# EAGLE board 1transmitter (EAGLE 7.2.0)
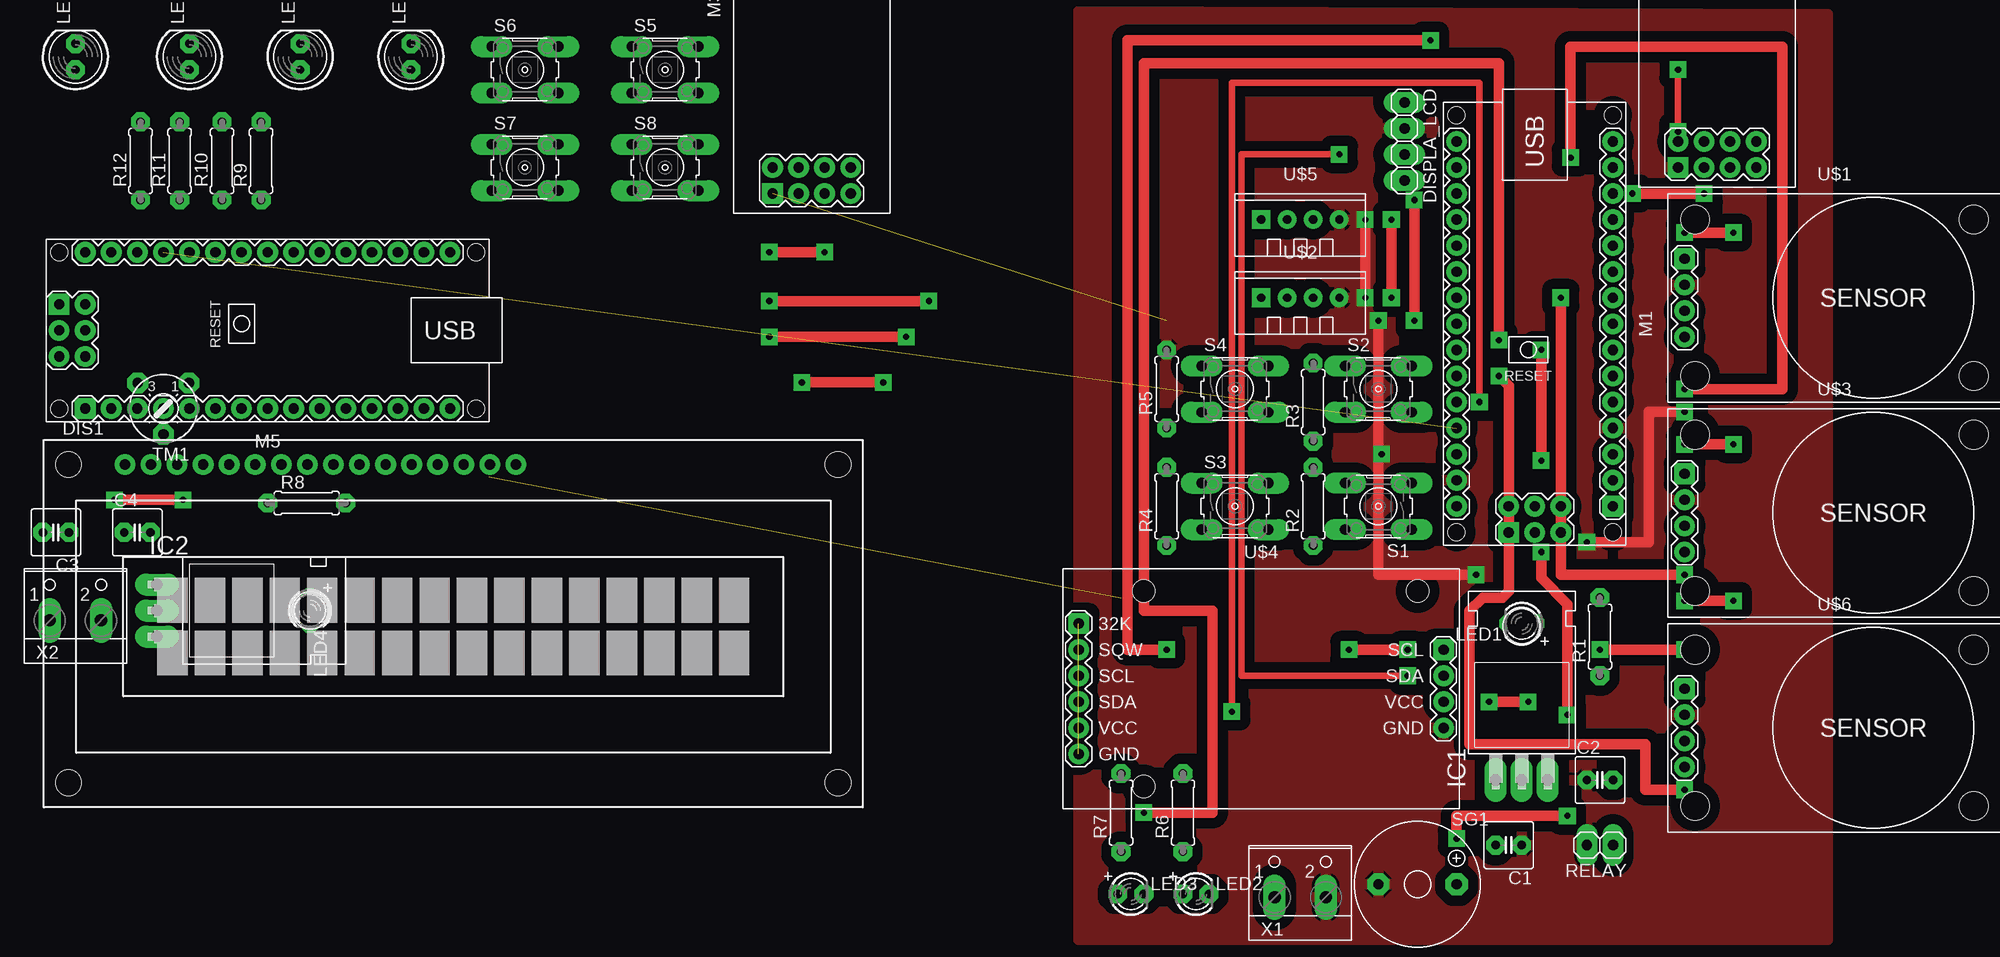
[diagram p0: board, top side]
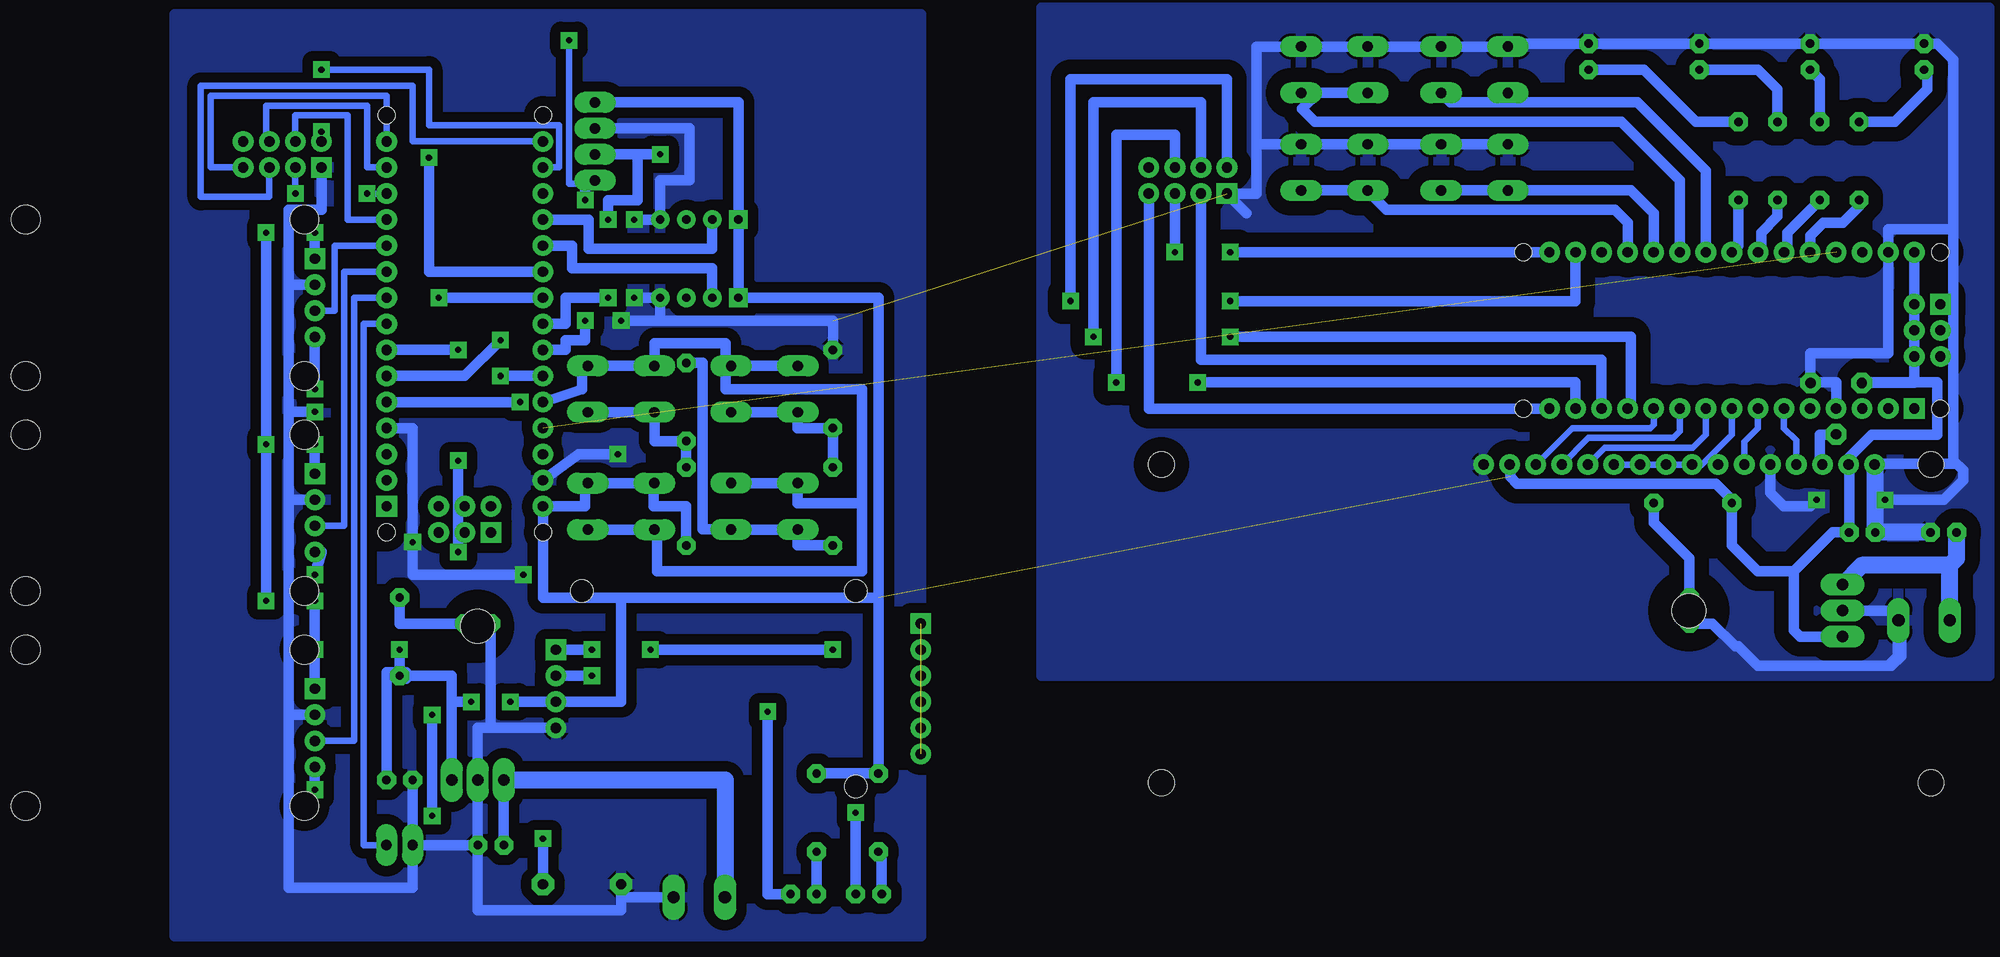
[diagram p1: board, bottom side, seen from below]

No outline drawn. Coordinates in mm, seen from the top.
Copper layers (1*16): Top 0.035mm / dielectric 1.5mm / Bottom 0.035mm
Design rules "default *": minimum track width 10mil, minimum drill 24mil, track to track 8mil, track to pad 8mil, pad to pad 8mil, via to via 8mil, smd to smd 8mil, copper to edge 40mil, drill to drill 8mil, minimum pad ring 21mil, minimum via ring 21mil, stop-mask expansion 4mil, vias tented up to drill 0mil, thermal gap 10mil

## Footprints (pad centres in the part's own frame; a part is rotated, then mirrored left to right if it is on the bottom)
C025-050X050 = drill 0.813 octagon: 1 -1.27,0; 2 1.27,0
TUXGR_16X2_R2 = drill 1 pad 1.676: 1 -32,15.5; 2 -29.46,15.5; 3 -26.92,15.5; 4 -24.38,15.5; 5 -21.84,15.5; 6 -19.3,15.5; 7 -16.76,15.5; 8 -14.22,15.5; 9 -11.68,15.5; 10 -9.14,15.5; 11 -6.6,15.5; 12 -4.06,15.5; 13 -1.52,15.5; 14 1.02,15.5; 15 3.56,15.5; 16 6.1,15.5 | hole 2.5: -37.5,-15.5; 37.5,-15.5; -37.5,15.5; 37.5,15.5
1X04 = drill 1.016 long: 1 -3.81,0; 2 -1.27,0; 3 1.27,0; 4 3.81,0
TO220H = drill 1.118 long: 1 -2.54,-10.16; 2 0,-10.16; 3 2.54,-10.16 | hole 3.302: 0,4.826
LED3MM = drill 0.813 pad 1.676 octagon: A -1.27,0; K 1.27,0
LED5MM = drill 0.813 pad 1.676 octagon: A -1.27,0; K 1.27,0
ARDUINO-NANO-3.0#ISP = drill 1 square: J1.1 17.78,7.62; J4.1 20.32,-2.54 | drill 1: J1.2 15.24,7.62; J1.3 12.7,7.62; J1.4 10.16,7.62; J1.5 7.62,7.62; J1.6 5.08,7.62; J1.7 2.54,7.62; J1.8 0,7.62; J1.9 -2.54,7.62; J1.10 -5.08,7.62; J1.11 -7.62,7.62; J1.12 -10.16,7.62; J1.13 -12.7,7.62; J1.14 -15.24,7.62; J1.15 -17.78,7.62; J2.1 17.78,-7.62; J2.2 15.24,-7.62; J2.3 12.7,-7.62; J2.4 10.16,-7.62; J2.5 7.62,-7.62; J2.6 5.08,-7.62; J2.7 2.54,-7.62; J2.8 0,-7.62; J2.9 -2.54,-7.62; J2.10 -5.08,-7.62; J2.11 -7.62,-7.62; J2.12 -10.16,-7.62; J2.13 -12.7,-7.62; J2.14 -15.24,-7.62; J2.15 -17.78,-7.62; J4.2 17.78,-2.54; J4.3 20.32,0; J4.4 17.78,0; J4.5 20.32,2.54; J4.6 17.78,2.54 | hole 1.651: -20.32,7.62; -20.32,-7.62; 20.32,-7.62; 20.32,7.62
WIRELESS-NRF24L01-PA-EXT = drill 1 square: 1 -18.415,3.81 | drill 1: 2 -15.875,3.81; 3 -18.415,1.27; 4 -15.875,1.27; 5 -18.415,-1.27; 6 -15.875,-1.27; 7 -18.415,-3.81; 8 -15.875,-3.81
0207/7 = drill 0.813 octagon: 1 -3.81,0; 2 3.81,0
1X02 = drill 1.016 long: 1 -1.27,0; 2 1.27,0
B3F-10XX = drill 1.016 long: 1 -3.251,2.261; 2 3.251,2.261; 3 -3.251,-2.261; 4 3.251,-2.261
F/TMB = drill 1.016 pad 2.159 octagon: + 3.81,0; - -3.81,0
6MM = drill 1 pad 1.676 octagon: A -2.5,-2.5; E 2.5,-2.5; S 0,2.5
GAS-SENSOR-MQ2 = drill 1 square: 1 -14.605,3.81 | drill 1: 2 -14.605,1.27; 3 -14.605,-1.27; 4 -14.605,-3.81 | hole 2.8: -13.589,7.62; -13.589,-7.62; 13.589,-7.62; 13.589,7.62
TEMP-HUM-SENSOR-DHT11 = drill 0.8 square: 1 -3.81,0 | drill 0.8: 2 -1.27,0; 3 1.27,0; 4 3.81,0
RTC-DS3231-AT24C32 = drill 1 square: J1.1 -17.78,6.35; J2.1 17.78,3.81 | drill 1: J1.2 -17.78,3.81; J1.3 -17.78,1.27; J1.4 -17.78,-1.27; J1.5 -17.78,-3.81; J1.6 -17.78,-6.35; J2.2 17.78,1.27; J2.3 17.78,-1.27; J2.4 17.78,-3.81 | hole 2.2: -11.43,-9.525; -11.43,9.525; 15.24,9.525
W237-102 = drill 1.194 long: 1 -2.5,-1.27; 2 2.5,-1.27

## Placement (x,y rotation side)
C1  [C025-050X050]  113.03,11.43 180 top
C2  [C025-050X050]  121.92,17.78 0 top
C3  [C025-050X050]  -28.57,41.91 180 top
C4  [C025-050X050]  -20.64,41.91 0 top
DIS1  TUXGR_16X2_R2  [TUXGR_16X2_R2]  10.16,33.02 0 top
DISPLA_LCD  [1X04]  102.87,80.01 270 top
IC1  7805T  [TO220H]  114.3,27.94 0 top
IC2  7805T  [TO220H]  -8.57,34.29 270 top
LED1  [LED3MM]  114.3,33.02 180 top
LED2  [LED3MM]  82.55,6.67 0 top
LED3  [LED3MM]  76.2,6.67 0 top
LED4  [LED3MM]  -3.81,34.29 270 top
LED5  [LED5MM]  6.03,88.27 90 top
LED6  [LED5MM]  -4.76,88.27 90 top
LED7  [LED5MM]  -15.56,88.27 90 top
LED8  [LED5MM]  -26.67,88.27 90 top
M1  ARDUINO-NANO-3.0#ISP  [ARDUINO-NANO-3.0#ISP]  115.57,62.23 270 top
M2  WIRELESS-NRF24L01-PA-EXT  [WIRELESS-NRF24L01-PA-EXT]  133.35,95.89 90 top
M3  WIRELESS-NRF24L01-PA-EXT  [WIRELESS-NRF24L01-PA-EXT]  45.09,93.34 90 top
M5  ARDUINO-NANO-3.0#ISP  [ARDUINO-NANO-3.0#ISP]  -7.94,61.59 180 top
R1  [0207/7]  121.92,31.75 90 top
R2  [0207/7]  93.98,44.45 90 top
R3  [0207/7]  93.98,54.61 90 top
R4  [0207/7]  79.69,44.45 90 top
R5  [0207/7]  79.69,55.88 90 top
R6  [0207/7]  81.28,14.61 90 top
R7  [0207/7]  75.25,14.61 90 top
R8  [0207/7]  -4.13,44.77 0 top
R9  [0207/7]  -8.57,78.11 90 top
R10  [0207/7]  -12.38,78.11 90 top
R11  [0207/7]  -16.51,78.11 90 top
R12  [0207/7]  -20.32,78.11 90 top
RELAY  [1X02]  121.92,11.43 180 top
S1  [B3F-10XX]  100.33,44.45 180 top
S2  [B3F-10XX]  100.33,55.88 0 top
S3  [B3F-10XX]  86.36,44.45 0 top
S4  [B3F-10XX]  86.36,55.88 0 top
S5  [B3F-10XX]  30.8,87 0 top
S6  [B3F-10XX]  17.14,87 0 top
S7  [B3F-10XX]  17.14,77.47 0 top
S8  [B3F-10XX]  30.8,77.47 0 top
SG1  F/TMB  [F/TMB]  104.14,7.62 0 top
TM1  [6MM]  -18.1,53.98 180 top
U$1  GAS-SENSOR-MQ2  [GAS-SENSOR-MQ2]  144.78,64.77 0 top
U$2  TEMP-HUM-SENSOR-DHT11  [TEMP-HUM-SENSOR-DHT11]  92.71,64.77 0 top
U$3  GAS-SENSOR-MQ2  [GAS-SENSOR-MQ2]  144.78,43.81 0 top
U$4  RTC-DS3231-AT24C32  [RTC-DS3231-AT24C32]  88.9,26.67 0 top
U$5  TEMP-HUM-SENSOR-DHT11  [TEMP-HUM-SENSOR-DHT11]  92.71,72.39 0 top
U$6  GAS-SENSOR-MQ2  [GAS-SENSOR-MQ2]  144.78,22.86 0 top
X1  [W237-102]  92.71,7.62 0 top
X2  [W237-102]  -26.67,34.61 0 top

## Library data of the parts
C1-C4 IC1 IC2 LED1-LED8 TM1 = adafruit
DIS1 = display-lcd; OC_FARNELL: unknown; OC_NEWARK: unknown
DISPLA_LCD RELAY = pinhead
M1-M3 M5 U$1-U$3 U$5 U$6 = diy-modules
R1-R12 = rcl
S1-S8 = switch-omron; MPN: B3F-1000; OC_FARNELL: 176432; OC_NEWARK: 36M3542
SG1 = buzzer; OC_FARNELL: unknown; OC_NEWARK: unknown
U$4 = diy-modules(1)
X1 X2 = con-wago-500; MPN: 237-102; OC_FARNELL: unknown; OC_NEWARK: 70K9898

## Nets
3.3V: M1.J2.14 M2.2
3.3VOLT: M3.2 M5.J2.14
5V: M1.J2.4 M5.J2.4
A_MQ: M1.J2.10 U$1.4
A_MQ1: M1.J2.9 U$3.4
A_MQ2: M1.J2.6 U$6.4
BUT1: M5.J2.10 S5.4
BUT2: M5.J2.9 S6.4
BUT3: M5.J2.12 S8.4
BUT4: M5.J2.11 S7.4
BUZZER: M1.J1.7 SG1.+
CE: M1.J1.13 M2.3
CE1: M3.3 M5.J1.13
CSN: M1.J1.12 M2.4
CSN1: M3.4 M5.J1.12
D4: DIS1.11 M5.J1.8
D5: DIS1.12 M5.J1.9
D6: DIS1.13 M5.J1.10
D7: DIS1.14 M5.J1.11
D_MQ: M1.J1.11 U$1.3
D_MQ1: M1.J1.10 U$3.3
D_MQ2: M1.J1.9 U$6.3
DATAPUSH: M1.J2.5 S1.1 S1.2 S2.1 S2.2 S3.1 S3.2 S4.1 S4.2
DHT_11: M1.J2.11 U$2.2
DHT_12: M1.J2.12 U$5.2
E: DIS1.6 M5.J1.7
GND: C1.1 C2.1 C3.1 C4.1 DIS1.1 DIS1.5 DIS1.16 DISPLA_LCD.2 IC1.2 IC2.2 LED1.K LED4.K LED5.K LED6.K LED7.K LED8.K M1.J1.4 M1.J2.2 M2.1 M3.1 M5.J1.4 M5.J2.2 R5.2 RELAY.2 S5.1 S5.2 S6.1 S6.2 S7.1 S7.2 S8.1 S8.2 SG1.- TM1.A U$1.2 U$2.4 U$3.2 U$4.J2.4 U$5.4 U$6.2 X1.2 X2.2
LED1: M5.J2.8 R9.1
LED2: M5.J2.7 R10.1
LED3: M5.J2.6 R11.1
LED4: M5.J2.5 R12.1
MISO: M1.J1.15 M2.7
MISO1: M3.7 M5.J1.15
MOSI: M1.J1.14 M2.6
MOSI1: M3.6 M5.J1.14
N$1: C1.2 IC1.1 X1.1
N$2: LED1.A R1.2
N$3: U$4.J1.1 U$4.J1.2 U$4.J1.3 U$4.J1.4 U$4.J1.5 U$4.J1.6
N$4: LED2.A R6.1
N$5: R2.2 R3.1 S2.3 S2.4
N$6: LED3.A R7.1
N$7: R3.2 R4.1 S3.3 S3.4
N$8: LED2.K M1.J1.5
N$9: R4.2 R5.1 S4.3 S4.4
N$10: LED3.K M1.J1.6
N$11: C3.2 IC2.1 X2.1
N$12: LED4.A R8.2
N$13: DIS1.3 TM1.S
N$14: M5.J1.5
N$24: LED5.A R9.2
N$25: LED6.A R10.2
N$26: LED7.A R11.2
N$27: LED8.A R12.2
RELAY: M1.J1.8 RELAY.1
RS: DIS1.4 M5.J1.6
SCK: M1.J2.15 M2.5
SCK1: M3.5 M5.J2.15
SCL: DISPLA_LCD.4 M1.J2.7 U$4.J2.1
SDA: DISPLA_LCD.3 M1.J2.8 U$4.J2.2
VCC: C2.2 C4.2 DIS1.2 DIS1.15 DISPLA_LCD.1 IC1.3 IC2.3 M1.J2.1 M5.J2.1 R1.1 R2.1 R6.2 R7.2 R8.1 S1.3 S1.4 TM1.E U$1.1 U$2.1 U$3.1 U$4.J2.3 U$5.1 U$6.1

## Tracks (layer width: path | path; a pad name or v marks a point on that pad's centre or on a via)
3.3V  (via drill 0.6)
  Top 0.61: v129.54,80.96 v129.54,87
  Bottom 0.61: M2.2 v129.54,80.96 | v129.54,87 119.06,87 119.06,81.6 106.36,81.6 106.36,77.47 M1.J2.14
3.3VOLT  (via drill 0.6)
  Top 1.016: v56.52,64.45 v40.96,64.45
  Bottom 1.016: M3.2 41.27,86.04 56.52,86.04 v56.52,64.45 | v40.96,64.45 7.3,64.45 M5.J2.14
5V  (1 unrouted)
A_MQ  (via drill 0.6)
  Top 1.016: v130.18,55.88 139.7,55.88 139.7,89.22 119.06,89.22 v119.06,78.42
  Bottom 1.016: M1.J2.10 119.06,67.31 v119.06,78.42 | v130.18,55.88 U$1.4
A_MQ1  (via drill 0.6)
  Top 1.016: v130.18,37.78 118.11,37.78 v118.11,64.77
  Bottom 1.016: U$3.4 129.54,40.01 v130.18,37.78 | v118.11,64.77 M1.J2.9
A_MQ2  (via drill 0.6)
  Top 1.016: v130.18,16.83 126.36,16.83 126.36,21.27 109.22,21.27 109.22,34.29 110.49,35.56 112.39,35.56 113.03,36.2 113.03,56.2 v112.08,57.15
  Bottom 1.016: U$6.4 v130.18,16.83 | v112.08,57.15 M1.J2.6
BUT1
  Bottom 1.016: M5.J2.10 -2.86,76.2 2.86,81.92 32.7,81.92 33.97,83.19 32.38,84.77 27.3,84.77 27.34,84.73 S5.4
BUT2
  Bottom 1.016: M5.J2.9 -5.4,77.15 1.27,83.82 19.48,83.82 S6.4
BUT3
  Bottom 1.016: M5.J2.12 2.22,72.07 3.49,73.34 25.72,73.34 27.62,75.25 34.01,75.25 S8.4
BUT4
  Bottom 1.016: M5.J2.11 -0.32,73.03 1.91,75.25 20.36,75.25 S7.4
BUZZER  (via drill 0.6)
  Top 1.016: v118.75,14.29 107.95,14.29 v107.95,12.06 | v118.75,24.13 118.75,34.92 116.2,37.47 v116.2,40.01 | v116.2,48.9 v116.2,59.69
  Bottom 1.016: v118.75,24.13 v118.75,14.29 | v107.95,12.06 SG1.+ | v116.2,40.01 v116.2,48.9 | v116.2,59.69 M1.J1.7
CE  (via drill 0.6)
  Top 0.61: 132.08,74.61 v132.08,74.93
  Top 1.016: v125.09,74.93 v132.08,74.93
  Bottom 0.61: M1.J1.13 v125.09,74.93 | v132.08,74.93 M2.3
CE1
  Bottom 1.016: M5.J1.13 4.76,58.74 43.81,58.74 M3.3
CSN
  Bottom 0.61: M2.4 132.08,82.55 127,82.55 127,72.39 M1.J1.12
CSN1  (via drill 0.6)
  Top 1.016: v40.96,60.96 v54.29,60.96
  Bottom 1.016: M5.J1.12 1.91,53.98 1.91,60.96 v40.96,60.96 | v54.29,60.96 54.29,83.82 43.81,83.82 M3.4
D4
  Bottom 0.61: DIS1.11 -5.02,48.52 -7.94,51.44 M5.J1.8
D5
  Bottom 0.61: M5.J1.9 -5.4,51.44 -4.13,50.16 4.46,50.16 DIS1.12
D6
  Bottom 0.61: M5.J1.10 -2.86,51.75 -2.22,51.12 6.04,51.12 DIS1.13
D7
  Bottom 0.61: M5.J1.11 -0.32,52.39 0,52.07 7.63,52.07 DIS1.14
D_MQ
  Bottom 0.61: M1.J1.11 128.27,69.85 128.27,63.5 U$1.3
D_MQ1
  Bottom 0.61: M1.J1.10 127.32,67.31 127.32,42.55 U$3.3
D_MQ2
  Bottom 0.61: M1.J1.9 126.36,64.77 126.36,21.59 U$6.3
DATAPUSH
  Bottom 1.016: S1.1 S1.2 96.84,42.19 96.84,38.1 76.83,38.1 76.83,44.77 | S3.2 S3.1 83.11,44.77 76.83,44.77 | S4.1 S4.2 90.17,58.14 | 90.17,58.14 90.17,60.33 97.08,60.33 S2.1 S2.2 104.14,58.14 104.14,55.88 M1.J2.5 | 76.83,44.77 76.83,55.88 90.17,55.88 90.17,58.14
DHT_11
  Bottom 1.016: U$2.2 91.44,67.63 105.09,67.63 105.09,69.85 M1.J2.11
DHT_12
  Bottom 1.016: U$5.2 91.44,69.53 103.5,69.53 103.5,72.39 M1.J2.12
E
  Bottom 0.61: DIS1.6 -9.14,50.73 -10.48,52.07 M5.J1.7
GND  (via drill 0.6)  (1 unrouted)
  Top 1.016: v99.06,64.77 v99.06,72.39 | v120.65,40.96 126.68,40.96 126.68,53.66 v130.18,53.66 | v100.65,49.53 100.33,49.53 | 100.33,49.53 v100.33,62.55 | v109.86,37.78 100.33,37.78 100.33,49.53 | v-16.19,45.09 v-22.86,45.09
  Bottom 1.016: X1.2 100.33,6.35 | 100.33,6.35 SG1.- | C1.1 114.3,5.08 100.33,5.08 100.33,6.35 | 120.65,12.7 RELAY.2 | C2.1 RELAY.2 | U$4.J2.4 113.03,22.86 | C1.1 IC1.2 114.3,22.86 113.03,22.86 | 113.03,22.86 LED1.K | 96.52,62.55 U$2.4 v99.06,64.77 | U$6.2 132.72,24.13 | 132.72,24.13 132.72,7.3 120.65,7.3 RELAY.2 | 132.72,45.09 132.72,53.66 | 132.72,53.66 132.72,66.04 | U$3.2 132.72,45.09 | 132.72,45.09 132.72,24.13 | U$1.2 132.72,66.04 | M2.1 129.54,73.34 132.72,73.34 132.72,66.04 | C1.1 RELAY.2 | M1.J1.4 120.65,52.07 v120.65,40.96 120.65,37.78 v109.86,37.78 | v130.18,53.66 132.72,53.66 | M1.J2.2 104.46,49.53 v100.65,49.53 | v100.33,62.55 96.52,62.55 | v99.06,72.39 U$5.4 96.52,76.2 93.66,76.2 93.66,81.28 DISPLA_LCD.2 | R5.2 79.69,62.55 96.52,62.55 | DIS1.1 -21.84,48.58 -29.53,48.58 -29.53,48.9 | M5.J1.4 -18.1,56.52 -15.6,56.52 TM1.A -15.6,59.37 -23.18,59.37 M5.J2.2 -23.18,71.44 -29.53,71.44 | -29.53,48.9 -29.53,71.44 | -29.53,71.44 -29.53,87.95 -27.94,89.53 LED8.K LED7.K LED6.K LED5.K 13.61,89.53 S6.1 S6.2 S5.1 S5.2 34.05,89.22 38.42,89.22 38.42,79.73 | S7.1 S7.2 S8.1 S8.2 38.42,79.73 | 38.42,79.73 38.42,74.93 M3.1 39.37,73.03 | X2.2 -24.17,34.25 -24.13,34.29 IC2.2 | DIS1.5 -11.68,45.79 -13.02,44.45 -15.56,44.45 v-16.19,45.09 | v-22.86,45.09 -28.57,45.09 -30.48,46.99 -30.48,47.94 -29.53,48.9 | LED4.K -6.03,33.02 -8.26,30.8 -8.57,30.8 -10.48,28.89 -23.18,28.89 | -23.18,28.89 -23.5,28.89 -24.45,29.84 -24.45,33.34 -24.13,33.66 -24.13,29.84 -23.18,28.89
  Bottom 1.676: C3.1 C4.1 -21.91,48.45 DIS1.1
  pour Bottom (isolate 1.016): 71.12,90.49 71.12,2.54 143.83,2.54 143.83,92.39 71.12,92.39
  pour Top (isolate 1.016): 71.12,92.71 144.15,92.39 144.15,2.22 71.12,2.22
  pour Bottom (isolate 1.422): -33.02,27.94 -33.02,93.03 59.37,93.03 59.37,27.94
LED1
  Bottom 1.016: R9.1 -8.57,69.85 M5.J2.8
LED2
  Bottom 1.016: R10.1 -12.38,72.71 -10.79,71.12 -10.79,69.53 M5.J2.7
LED3
  Bottom 1.016: R11.1 -13.34,71.12 -13.34,69.53 M5.J2.6
LED4
  Bottom 1.016: R12.1 -20.32,73.66 -18.73,72.07 -16.83,72.07 -15.56,70.8 M5.J2.5
MISO
  Bottom 0.61: M2.7 140.34,77.47 140.34,84.45 123.19,84.45 M1.J1.15
MISO1
  Bottom 1.016: M5.J1.15 48.9,53.98 M3.7
MOSI
  Bottom 0.61: M2.6 134.94,80.01 134.94,83.5 125.09,83.5 125.09,77.47 M1.J1.14
MOSI1  (via drill 0.6)
  Top 1.016: v52.07,56.52 v44.13,56.52
  Bottom 1.016: M3.6 46.35,80.64 52.07,80.64 v52.07,56.52 | v44.13,56.52 7.3,56.52 M5.J1.14
N$1
  Bottom 1.016: IC1.1 C1.2
  Bottom 1.676: X1.1 90.17,6.35 90.17,17.78 IC1.1
N$2
  Bottom 1.016: LED1.A 121.92,33.02 R1.2
N$3  (5 unrouted)
N$4
  Bottom 1.016: R6.1 LED2.A
N$5
  Bottom 1.016: R2.2 R3.1 97.08,50.8 S2.3 S2.4
N$6
  Bottom 1.016: R7.1 74.93,10.79 LED3.A
N$7
  Bottom 1.016: R3.2 92.39,58.42 92.39,42.23 89.61,42.23 S3.4 S3.3 83.11,40.64 R4.1
N$8  (via drill 0.6)
  Top 0.61: v86.04,24.45 86.04,85.72 110.17,85.72 v110.17,54.61
  Bottom 1.016: LED2.K 86.04,6.67 v86.04,24.45 | M1.J1.5 121.28,54.61 | 121.28,54.61 120.97,54.61 | v110.17,54.61 121.28,54.61
N$9
  Bottom 1.016: S4.4 S4.3 83.11,52.07 R5.1 R4.2
N$10  (via drill 0.6)
  Top 1.016: v112.08,60.64 112.08,87.63 77.47,87.63 77.47,34.29 84.14,34.29 84.14,14.61 v77.47,14.61
  Bottom 1.016: M1.J1.6 115.57,57.15 v112.08,60.64 | v77.47,14.61 LED3.K
N$11
  Bottom 1.676: X2.1 -29.17,38.7 | -29.17,38.7 -29.84,39.37 C3.2 | -29.17,38.7 -20.6,38.7 IC2.1
N$12
  Bottom 1.016: LED4.A -3.81,39.37 -0.32,42.86 R8.2
N$13
  Bottom 1.016: DIS1.3 -16.51,48.52 -16.51,51.44 -18.1,51.44 TM1.S
N$24
  Bottom 1.016: R9.2 -4.45,81.92 0.64,87 LED5.A
N$25
  Bottom 1.016: R10.2 -12.38,85.09 -10.48,87 LED6.A
N$26
  Bottom 1.016: R11.2 -16.51,86.04 LED7.A
N$27
  Bottom 1.016: R12.2 -23.81,81.92 -26.99,85.09 -26.99,86.68 LED8.A
RELAY
  Bottom 0.61: RELAY.1 125.41,11.43 125.41,62.23 M1.J1.8
RS
  Bottom 0.61: DIS1.4 -14.22,50.87 -13.02,52.07 M5.J1.6
SCK
  Bottom 0.61: M2.5 134.62,74.61 141.29,74.61 141.29,85.41 120.65,85.41 120.65,80.01 M1.J2.15
SCK1  (via drill 0.6)
  Top 1.016: v46.35,69.22 v40.96,69.22
  Bottom 1.016: M3.5 v46.35,69.22 | v40.96,69.22 M5.J2.15
SCL  (via drill 0.6)
  Top 1.016: v103.82,62.55 v103.82,74.3 | v103.19,30.48 v97.47,30.48 | v79.69,30.48 75.88,30.48 75.88,89.85 v105.41,89.85
  Bottom 0.61: v105.41,89.85 105.41,75.88 102.87,75.88 DISPLA_LCD.4
  Bottom 1.016: M1.J2.7 105.73,59.69 105.73,60.64 103.82,60.64 v103.82,62.55 | v103.82,74.3 103.82,76.2 DISPLA_LCD.4 | U$4.J2.1 v103.19,30.48 | v97.47,30.48 v79.69,30.48
SDA  (via drill 0.6)
  Top 0.61: v103.19,27.94 87,27.94 87,78.74 v96.52,78.74
  Top 1.016: v101.6,64.77 v101.6,72.39
  Bottom 1.016: v101.6,72.39 101.6,74.3 98.74,74.3 98.74,78.74 | 98.74,78.74 DISPLA_LCD.3 | v101.6,64.77 105.73,64.77 105.73,62.23 M1.J2.8 | U$4.J2.2 v103.19,27.94 | v96.52,78.74 98.74,78.74
VCC  (via drill 0.6)  (1 unrouted)
  Top 1.016: v111.12,25.4 v114.94,25.4 | v130.18,30.48 v121.92,30.48 | v130.18,35.24 v134.94,35.24 | v134.94,71.12 v130.18,71.12 | v130.18,50.48 v134.94,50.48
  Bottom 1.016: 100.33,35.56 100.33,25.4 U$4.J2.3 v111.12,25.4 | 100.33,35.56 107.95,35.56 M1.J2.1 103.82,44.45 103.82,46.71 S1.3 S1.4 97.16,46.71 97.16,44.45 93.98,44.45 R2.1 | DISPLA_LCD.1 88.9,83.82 U$5.1 U$2.1 75.25,64.77 75.25,35.56 | 75.25,35.56 100.33,35.56 | IC1.3 116.84,25.4 | 116.84,25.4 116.84,27.94 R1.1 | R1.1 122.24,27.94 122.24,27.62 121.28,27.62 121.28,28.26 123.19,28.26 C2.2 | v114.94,25.4 116.84,25.4 | 129.86,26.67 U$6.1 v130.18,30.48 v130.18,35.24 | v121.92,30.48 R1.1 | v134.94,35.24 v134.94,50.48 v134.94,71.12 | v130.18,71.12 U$1.1 | U$3.1 v130.18,50.48 | R6.2 R7.2 75.25,35.56 | M5.J2.1 -25.72,56.48 TM1.E -20.6,56.52 -27.94,56.52 -27.94,51.44 -21.59,51.44 -19.3,49.15 DIS1.2 -19.37,48.45 C4.2 -17.78,41.91 -13.97,38.1 | -13.97,38.1 -13.97,32.38 -14.61,31.75 IC2.3 | -13.97,38.1 -10.48,38.1 -7.94,40.64 R8.1 -7.94,45.09 -6.35,46.67 13.02,46.67 13.65,47.31 13.65,48.45 DIS1.15